# Altium PCB CHESSOBC_rev1.PcbDoc (part 3 of 4)
Units mm, origin at the board's own origin, x right, y up, seen from the top; angles counter-clockwise.
Board outline 96.01 x 90.17 mm, 6 copper layers (Top Layer, +3.3V, Layer 2, Layer 3, GND, Bottom Layer), stack 0.816 mm thick; 143 components, 230 nets, 1063 pads, 572 vias.
Unrouted connection lines stored in the file: 5.
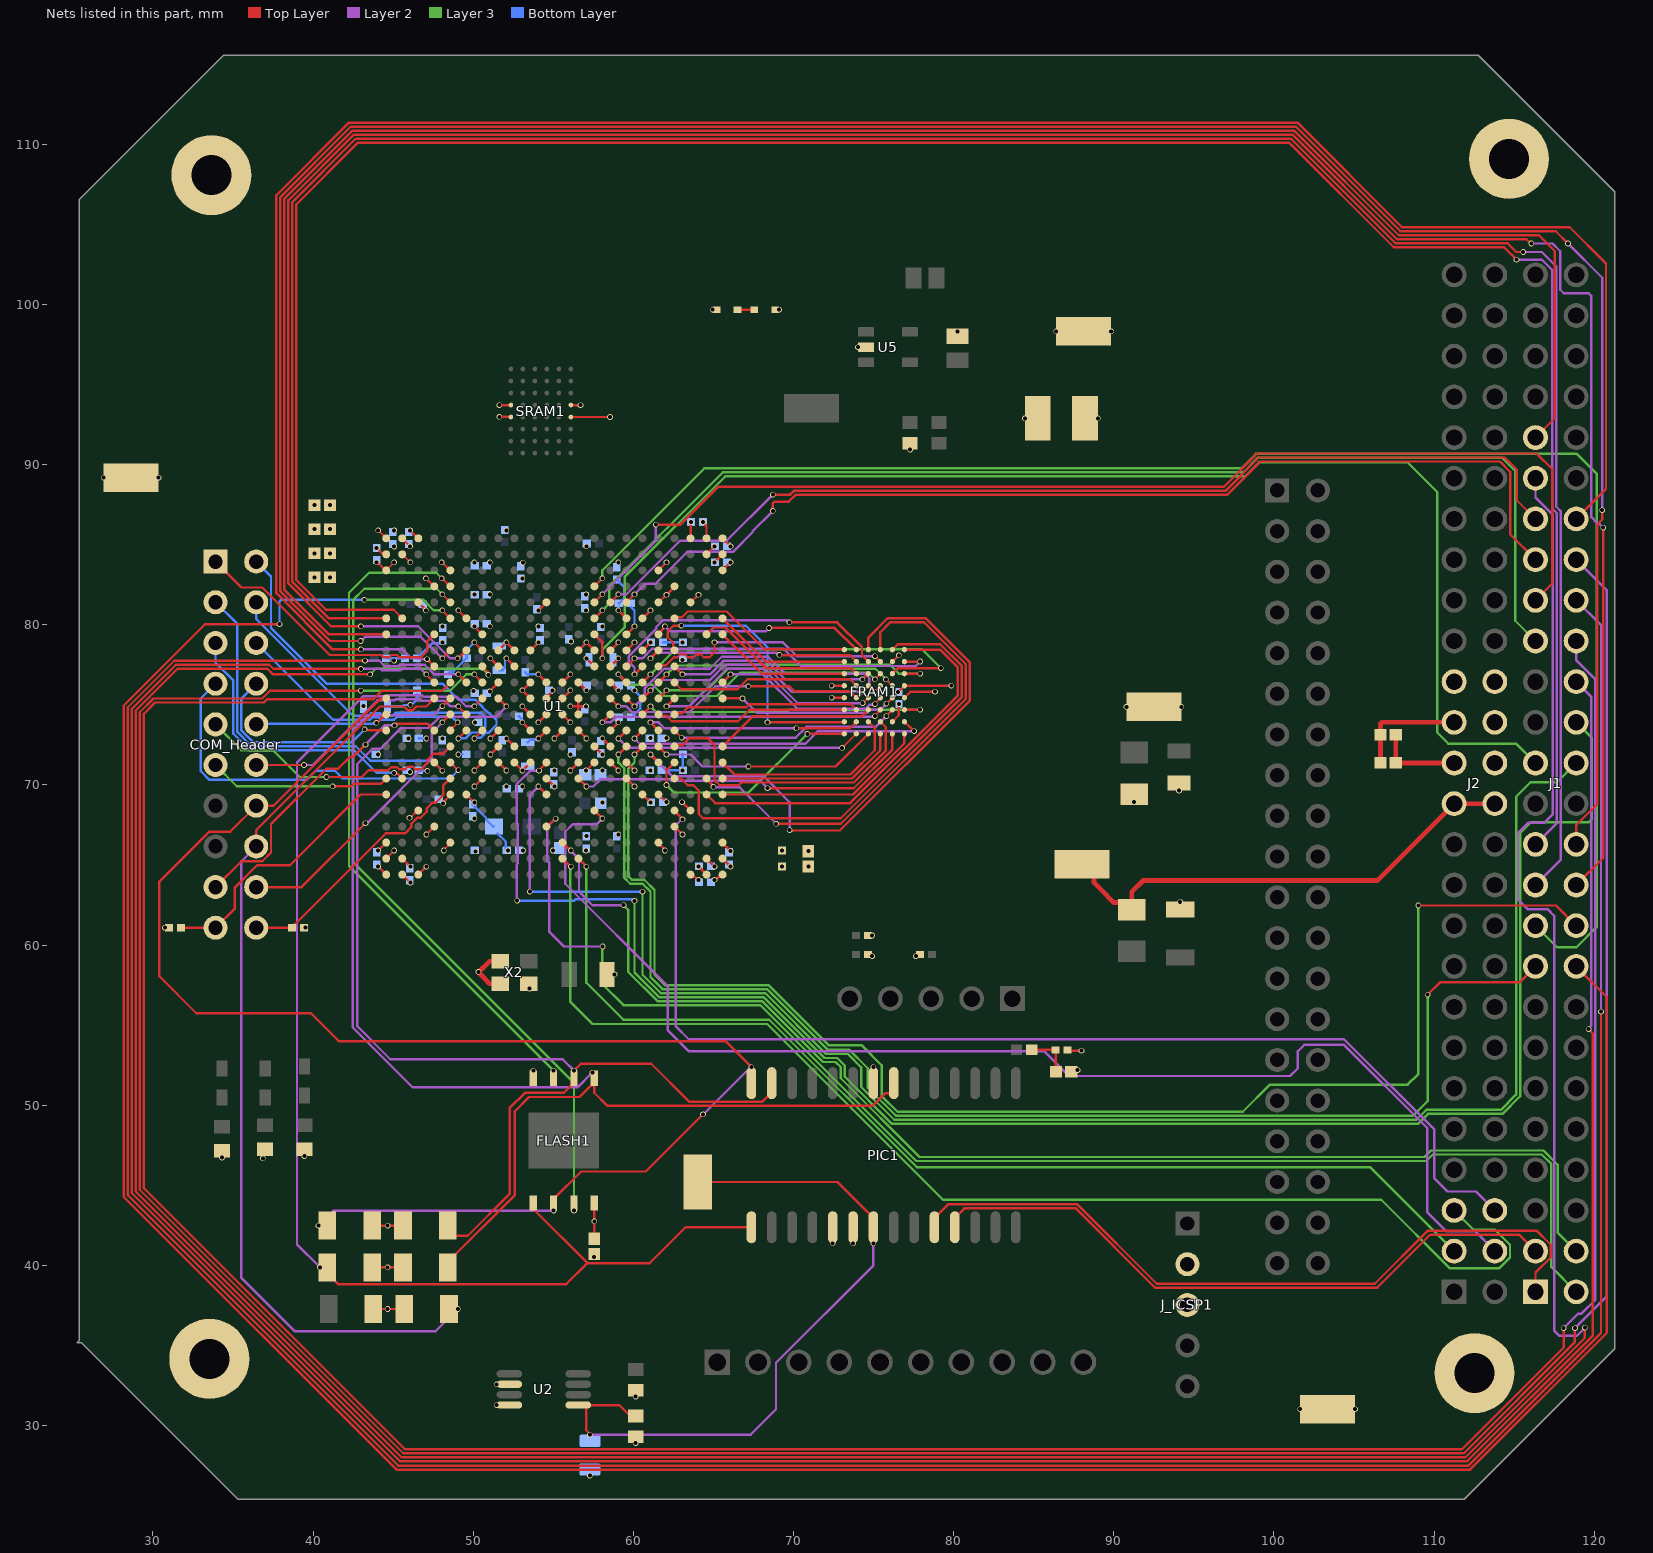
[diagram p6: the nets of this part, all layers, seen from the top]

## Via types
v1: diameter 0.35, hole 0.25, Top Layer to Bottom Layer, tented bottom, 572 vias

## Nets (pads, with @x,y where several pads share a name; then routed paths per layer and width w, separated by ;. In a path a pad name is that pad's centre, name@x,y a point inside that pad or via, vN(x,y) a via of type N, cw(c..) or ccw(c..) an arc to the next point about the centre after c; other vN are vias at no path point) (continued)
+3.3V: C2.2 C3.1 C4.2 C5.2 C9.2 C10.2 C12.2 C13.2 C14.2 C15.2 C44.1 C45.1 C46.1 C47.1 C48.2 C49.1 C50.1 C51.1 C52.1 C53.2 C54.1 C55.1 C56.1 C57.1 C59.1 C62.1 C63.1 C64.1 C65.1 C66.1 C67.2 C68.1 C69.1 C70.1 C71.1 C73.1 C74.1 C75.1 C76.1 C77.2 C78.1 C79.1 C80.1 C81.1 C82.1 C83.1 C86.1 C87.1 C88.1 C89.1 C100.2 D1.1 FLASH1.8 FRAM1.D6 FRAM1.E1 J2.27 J2.28 J_ICSP1.2 L2.2 LED2.2 PIC1.20 R1.2 R6.2 R9.2 R10.2 R11.2 R14.1 R15.1 R18.2 R19.2 R20.2 R21.2 R22.2 R23.2 SRAM1.D6 SRAM1.E1 T1.1 U1.A3 U1.A20 U1.AA2 U1.AA21 U1.AB3 U1.AB20 U1.B2 U1.B21 U1.C1 U1.C22 U1.F6 U1.F17 U1.H8 U1.H9 U1.H10 U1.H13 U1.H14 U1.H15 U1.J8 U1.J15 U1.K8 U1.K15 U1.N8 U1.N15 U1.P8 U1.P15 U1.R8 U1.R9 U1.R10 U1.R13 U1.R14 U1.R15 U1.T17 U1.U6 U1.U15 U1.U17 U1.Y1 U1.Y22 U2.2 X2.1 X2.4 | length 55.6
  Top Layer w0.15: R21.2@43.691,42.487 v1(44.663,42.487) 45.064,42.487 ; v1(43.974,83.906) 44.022,83.906 44.522,83.406 U1.A20@44.57,83.406 v1(45.07,83.906) ; v1(44.07,65.906) U1.A3@44.57,66.406 ; 44.241,39.883 v1(44.663,39.883) 45.064,39.883 ; 44.319,37.279 v1(44.663,37.279) R20.2@45.691,37.279 ; U1.B2@45.57,65.406 v1(46.07,64.906) ; U1.B21@45.57,84.406 v1(46.07,83.906) ; v1(46.056,85.906) 46.063,85.906 46.563,85.406 U1.C22@46.57,85.406 ; U1.C1@46.57,64.406 v1(47.07,64.906) ; v1(49.07,80.906) U1.F17@49.57,80.406 ; U1.F6@49.57,69.406 v1(50.07,68.906) ; v1(51.038,75.852) 51.038,75.863 51.57,76.395 U1.H13@51.57,76.406 ; v1(51.07,71.906) U1.H9@51.57,72.406 ; v1(51.07,72.906) U1.H10@51.57,73.406 ; v1(51.07,77.906) U1.H14@51.57,77.406 ; U1.H8@51.57,71.406 v1(52.07,70.906) ; U1.H15@51.57,78.406 v1(52.07,78.906) U1.J15@52.57,78.406 ; v1(51.639,92.988) 51.645,92.982 52.342,92.982 SRAM1.E1@52.348,92.976 ; U1.J8@52.57,71.406 v1(53.07,70.906) ; v1(53.07,70.906) U1.K8@53.57,71.406 ; U1.K15@53.57,78.406 v1(54.07,78.906) ; v1(56.07,70.906) U1.N8@56.57,71.406 ; SRAM1.D6@56.098,93.726 56.105,93.719 56.693,93.719 v1(56.7,93.713) ; U1.N15@56.57,78.406 v1(57.07,78.906) U1.P15@57.57,78.406 ; v1(57.045,70.906) 57.057,70.906 57.557,71.406 U1.P8@57.57,71.406 ; 57.562,42.043 v1(57.562,42.755) FLASH1.8@57.562,43.891 ; v1(58.07,72.906) U1.R9@58.57,72.406 ; U1.R8@58.57,71.406 v1(59.07,70.906) ; U1.R10@58.57,73.406 v1(59.07,73.906) ; U1.R13@58.57,76.406 v1(59.07,75.906) ; U1.R14@58.57,77.406 v1(59.07,77.906) ; U1.R15@58.57,78.406 v1(59.07,78.906) ; v1(59.07,80.906) U1.T17@59.57,80.406 ; U1.U6@60.57,69.406 v1(61.07,68.906) ; U1.U15@60.57,78.406 v1(61.07,78.906) ; U1.U17@60.57,80.406 v1(61.07,80.906) ; U1.Y1@63.57,64.406 v1(64.081,64.081) ; U1.Y22@63.57,85.406 63.582,85.419 63.582,86.407 v1(63.595,86.42) ; U1.AA2@64.57,65.406 v1(65.07,64.906) ; U1.AA21@64.57,84.406 v1(65.07,84.906) ; U1.AB3@65.57,66.406 65.57,66.387 66.07,65.887 v1(66.07,65.868) ; U1.AB20@65.57,83.406 v1(66.07,83.906) ; v1(72.386,75.45) FRAM1.E1@73.176,75.45 ; v1(76.526,75.8) FRAM1.D6@76.926,76.2 v1(79.861,76.2) ; R1.2@87.113,53.459 87.165,53.406 v1(87.984,53.406)
  Top Layer w0.3: v1@50.319,58.292 v1@50.332,58.306 ; v1(50.319,58.332) 50.319,58.319 v1@50.332,58.306 ; 51.128,57.593 51.019,57.593 50.753,57.859 50.753,57.885 v1@50.332,58.306 ; 51.128,58.993 51.02,58.993 v1@50.332,58.306 ; C9.2@107.612,71.374 J2.27@111.252,71.374 ; 107.612,71.734 C4.2@107.612,73.139
  Bottom Layer w0.15: C49.1@46.498,77.92 46.52,77.92 47.459,78.859 48.023,78.859 v1(48.07,78.906) ; C44.1@46.593,70.92 46.636,70.878 v1(47.138,70.878) ; C47.1@46.593,72.92 46.607,72.906 v1(47.07,72.906) ; C89.1@49.965,68.79 50.799,67.956 50.799,67.845 51.224,67.42 L2.2@51.299,67.42 ; L2.2@51.525,66.97 52.031,66.464 52.031,65.967 52.076,65.922 52.154,65.922 v1(52.17,65.906) ; C62.1@58.973,82.834 58.973,82.813 59.42,82.366 59.42,81.651 59.117,81.347 C68.1@59.095,81.347 ; v1(59.07,80.906) 59.095,80.932 59.095,81.111
  other v1: 60.149,31.81 51.461,32.58 73.721,41.383 74.909,60.599 30.752,61.087 39.519,61.087 70.934,65.868 57.045,65.906 69.276,65.906 91.275,68.931 52.07,69.906 55.07,70.906 61.07,70.906 61.07,72.923 90.785,74.875 94.215,74.875 43.154,74.922 51.038,79.906 57.049,80.906 51.038,81.906 53.07,82.906 40.089,82.961 50.07,83.906 40.089,84.466 45.067,85.906 40.089,85.97 40.089,87.474 77.281,90.934 89.003,92.899 64.947,99.681
+5Vin: J2.25 J2.26 LED1.2 T2.1 | length 30.3
  Top Layer w0.3: T2.1@88.131,64.534 88.555,64.534 88.774,64.315 88.774,63.891 89.184,63.48 90.009,62.656 90.68,62.656 LED1.2@91.125,62.211 91.125,63.331 91.825,64.031 106.449,64.031 J2.25@111.252,68.834 J2.26@113.792,68.834
CASE: ST1.1 ST2.1 ST3.1 ST4.1
GND: C1.1 C2.1 C3.2 C4.1 C5.1 C6.1 C7.1 C8.1 C9.1 C10.1 C12.1 C13.1 C14.1 C15.1 C16.2 C17.2 C18.2 C19.2 C20.2 C21.2 C22.2 C23.2 C24.2 C25.2 C26.2 C27.2 C28.2 C29.2 C30.2 C31.2 C32.2 C33.2 C34.2 C35.2 C36.2 C37.2 C38.2 C39.2 C40.2 C41.2 C42.2 C43.2 C44.2 C45.2 C46.2 C47.2 C48.1 C49.2 C50.2 C51.2 C52.2 C53.1 C54.2 C55.2 C56.2 C57.2 C58.1 C59.2 C62.2 C63.2 C64.2 C65.2 C66.2 C67.1 C68.2 C69.2 C70.2 C71.2 C73.2 C74.2 C75.2 C76.2 C77.1 C78.2 C79.2 C80.2 C81.2 C82.2 C83.2 C86.2 C87.2 C88.2 C89.2 C100.1 C101.2 D2.2 FLASH1.4 FRAM1.B5 FRAM1.D1 FRAM1.E6 J2.29 J2.30 J2.31 J2.32 J_ICSP1.3 PIC1.8 PIC1.19 R7.1 R8.1 R17.1 R100.2 R101.2 R_LED3_80Ohm.2 R_LED4_80Ohm.2 R_LED5_80Ohm.2 SRAM1.D1 SRAM1.E6 T4.1 T5.1 T6.1 U1.A1 U1.A2 U1.A21 U1.A22 U1.AA1 U1.AA22 U1.AB1 U1.AB2 U1.AB21 U1.AB22 U1.B1 U1.B22 U1.C5 U1.C18 U1.D4 U1.D19 U1.E3 U1.E6 U1.E20 U1.G7 U1.G8 U1.G15 U1.G16 U1.J9 U1.J14 U1.K10 U1.K11 U1.K12 U1.K13 U1.L7 U1.L10 U1.L11 U1.L12 U1.L13 U1.L18 U1.M10 U1.M11 U1.M12 U1.M13 U1.N10 U1.N11 U1.N12 U1.N13 U1.P9 U1.P14 U1.T7 U1.T8 U1.T15 U1.T16 U1.V3 U1.V6 U1.V18 U1.V20 U1.W4 U1.W19 U1.Y5 U1.Y18 U2.4 U5.2 X2.2 | length 70.9
  Top Layer w0.15: v1(43.974,84.799) 44.3,84.473 44.503,84.473 U1.A21@44.57,84.406 ; v1(44.07,64.906) U1.A1@44.57,64.406 ; v1(44.07,85.906) U1.A22@44.57,85.406 ; U1.A2@44.57,65.406 v1(45.07,65.906) ; U1.B1@45.57,64.406 v1(46.07,63.906) ; U1.B22@45.57,85.406 45.57,85.396 46.056,84.91 v1(46.056,84.899) ; v1(46.022,67.954) 46.07,67.954 46.522,68.406 U1.C5@46.57,68.406 ; U1.C18@46.57,81.406 46.57,81.393 47.043,80.919 v1(47.043,80.906) ; v1(47.043,82.901) 47.059,82.901 47.554,82.406 U1.D19@47.57,82.406 ; v1(47.07,66.906) U1.D4@47.57,67.406 ; v1(48.035,83.906) 48.052,83.906 48.552,83.406 U1.E20@48.57,83.406 ; v1(48.118,68.858) 48.118,68.906 48.57,69.358 U1.E6@48.57,69.406 ; v1(48.166,65.906) 48.166,65.954 48.57,66.358 U1.E3@48.57,66.406 ; v1(50.07,69.906) U1.G7@50.57,70.406 ; v1(50.07,70.906) U1.G8@50.57,71.406 ; v1(50.07,78.906) U1.G15@50.57,78.406 ; v1(50.07,79.906) U1.G16@50.57,79.406 ; v1(51.639,93.713) 51.646,93.719 52.341,93.719 SRAM1.D1@52.348,93.726 ; v1(52.07,72.906) U1.J9@52.57,72.406 ; v1(52.07,77.906) U1.J14@52.57,77.406 ; v1(53.07,73.906) U1.K10@53.57,73.406 ; v1(53.07,74.906) U1.K11@53.57,74.406 ; U1.K12@53.57,75.406 v1(53.07,75.906) U1.K13@53.57,76.406 ; v1(54.07,72.906) U1.L10@54.57,73.406 ; v1(54.07,73.906) U1.L11@54.57,74.406 ; v1(54.07,76.906) U1.L13@54.57,76.406 ; v1(54.07,80.906) U1.L18@54.57,81.406 ; U1.L7@54.57,70.406 v1(55.07,69.906) ; U1.L12@54.57,75.406 54.57,75.467 54.954,75.852 v1(54.954,75.906) ; v1(55.07,72.906) U1.M10@55.57,73.406 ; U1.M11@55.57,74.406 v1(56.07,73.906) ; U1.M12@55.57,75.406 v1(56.07,75.906) ; U1.M13@55.57,76.406 v1(56.07,76.906) ; v1(56.07,74.906) 56.57,74.906 ; SRAM1.E6@56.098,92.976 v1(58.542,92.976) ; U1.N10@56.57,73.406 v1(57.07,72.906) ; U1.N11@56.57,74.406 56.57,74.906 ; U1.N12@56.57,75.406 56.57,74.906 ; U1.N13@56.57,76.406 v1(57.07,75.906) ; v1(57.045,74.906) 56.57,74.906 ; v1(57.07,77.906) U1.P14@57.57,77.406 ; U1.P9@57.57,72.406 v1(58.07,71.906) ; U1.T7@59.57,70.406 v1(60.07,69.906) ; U1.T8@59.57,71.406 v1(60.07,70.906) ; U1.T15@59.57,78.406 v1(60.07,78.906) ; U1.T16@59.57,79.406 v1(60.07,79.906) ; U1.V3@61.57,66.406 61.57,66.356 61.97,65.956 v1(61.97,65.906) ; U1.V6@61.57,69.406 61.582,69.406 62.057,68.931 v1(62.07,68.931) ; U1.V18@61.57,81.406 61.588,81.406 62.052,81.87 v1(62.07,81.87) 62.57,82.37 U1.W19@62.57,82.406 ; U1.V20@61.57,83.406 v1(62.07,83.906) ; U1.W4@62.57,67.406 v1(63.07,66.906) ; v1(63.036,68.931) 63.04,68.931 63.565,68.406 U1.Y5@63.57,68.406 ; U1.Y18@63.57,81.406 63.588,81.406 64.052,81.87 v1(64.07,81.87) ; v1(64.07,64.908) U1.AA1@64.57,64.406 ; v1(64.352,86.42) 64.352,86.366 64.57,86.148 U1.AA22@64.57,85.406 ; v1(65.07,64.081) U1.AB1@65.57,64.406 ; v1(65.07,83.906) U1.AB21@65.57,84.406 ; U1.AB22@65.57,85.406 v1(66.07,84.906) ; U1.AB2@65.57,65.406 v1@66.069,64.908 ; v1(72.386,76.2) FRAM1.D1@73.176,76.2 ; FRAM1.B5@76.176,77.7 v1(76.576,78.1) ; FRAM1.E6@76.926,75.45 77.301,75.825 v1(78.838,75.825) ; C4.1@106.652,73.139 C4.1@106.672,73.139
  Top Layer w0.3: C9.1@106.652,71.374 106.652,72.779 ; 106.652,73.499 106.652,73.826 106.74,73.914 J2.29@111.252,73.914
  Bottom Layer w0.15: C19.2@44.572,77.92 44.586,77.906 v1@45.07,77.906 ; 44.879,74.92 45.595,74.92 45.67,74.995 46.059,74.995 v1(46.07,75.006) ; v1(45.07,77.767) v1@45.07,77.906 ; C49.2@45.741,77.92 45.727,77.906 v1@45.07,77.906 ; v1@46.113,74.963 46.498,75.348 46.498,75.684 ; 46.853,81.049 46.873,81.049 47.016,80.906 v1(47.043,80.906) ; C25.2@48.425,76.92 48.586,77.081 48.756,77.081 49.412,77.737 49.412,77.759 49.573,77.92 C27.2@49.595,77.92 49.595,78.431 v1(50.07,78.906) ; v1(49.073,71.906) 49.087,71.92 49.31,71.92 ; C67.1@51.639,77.17 51.839,77.17 51.989,77.32 51.989,77.771 52.07,77.852 v1(52.07,77.906) ; C23.2@52.853,74.285 52.874,74.285 53.035,74.124 53.035,73.941 v1(53.07,73.906) ; C31.2@53.243,77.041 53.378,76.906 v1(54.07,76.906) ; C48.1@53.415,72.67 53.565,72.82 53.93,72.82 54.016,72.906 v1(54.07,72.906) ; C41.2@58.974,66.799 59.07,66.894 v1(59.07,66.906) ; C75.2@59.853,74.23 59.874,74.23 60.2,74.556 60.215,74.556 60.42,74.761 60.42,75.556 v1(60.07,75.906) 60.032,75.944 59.884,75.944 59.853,75.976 ; 59.853,81.111 60.07,80.894 v1(60.07,79.906) ; C69.2@61.853,78.919 63.057,78.919 v1(63.07,78.906) ; 62.037,70.92 C43.2@63.095,70.92 ; 63.095,71.156 C37.2@63.095,71.921
  other v1: 57.287,26.879 60.149,28.906 101.632,31.02 105.062,31.02 51.461,31.28 57.547,40.514 72.451,41.383 36.868,46.688 34.313,46.742 39.46,46.823 53.752,52.166 87.74,52.193 74.991,52.383 53.531,57.287 58.825,58.175 74.909,59.318 77.637,59.318 94.15,62.709 66.07,64.908 69.276,64.906 70.934,64.908 50.153,65.858 53.12,65.906 54.974,65.906 57.07,66.801 50.07,67.906 58.07,68.906 94.075,69.65 53.07,69.906 46.061,70.801 58.07,70.906 63.07,70.906 44.07,71.906 56.07,71.906 45.96,72.906 48.07,72.906 62.07,72.923 50.1,73.906 50.032,75.868 63.07,77.81 56.107,78.962 48.07,79.906 54.07,79.906 58.07,79.906 50.07,81.906 57.049,81.906 41.049,82.961 53.095,83.881 51.038,83.906 59.07,83.906 41.049,84.466 45.067,84.894 57.07,84.906 52.07,85.906 41.049,85.97 41.049,87.474 26.929,89.189 30.359,89.189 84.453,92.899 74.031,97.341 80.24,98.323 86.401,98.33 89.842,98.33 69.107,99.681
NetC1_2: C1.2 R1.1 R2.1 | length 2.6
  Top Layer w0.15: R2.1@84.884,53.459 R1.1@86.363,53.459 ; 86.363,53.234 86.383,53.214 C1.2@86.383,52.084
NetC58_2: C58.2 PIC1.21 R17.2 T7.1 U2.5 | length 43.6
  Top Layer w0.15: U2.5@56.561,31.28 U2.5@56.922,31.28 ; v1(57.287,29.429) 57.287,29.483 57.061,29.71 57.061,31.141 U2.5@56.922,31.28 ; R17.2@60.149,30.33 60.074,30.33 59.124,31.28 U2.5@56.922,31.28 ; T7.1@64.008,45.207 72.746,45.207 74.991,42.962 PIC1.21@74.991,42.383
  Layer 2 w0.15: v1(57.287,29.429) 67.32,29.429 68.908,31.018 68.908,33.922 74.991,40.005 v1(74.991,41.383)
NetCOM_Header_1: COM_Header.1 U1.D16 | length 17.2
  Top Layer w0.15: COM_Header.1@33.909,83.947 35.524,82.332 36.832,82.332 41.047,78.117 44.258,78.117 44.394,77.981 44.746,77.981 44.882,78.117 45.258,78.117 45.394,77.981 46.746,77.981 47.125,78.359 47.125,78.961 U1.D16@47.57,79.406
NetCOM_Header_2: COM_Header.2 U1.G10 | length 23.7
  Top Layer w0.15: v1(50.07,72.906) U1.G10@50.57,73.406
  Bottom Layer w0.15: COM_Header.2@36.449,83.947 37.374,83.022 37.374,79.797 40.84,76.331 48.084,76.331 49.102,75.313 50.158,75.313 50.56,74.911 50.56,74.889 50.979,74.47 51.038,74.47 51.457,74.051 51.457,73.761 50.952,73.256 50.774,73.256 50.462,72.944 50.108,72.944 v1(50.07,72.906)
NetCOM_Header_3: COM_Header.3 U1.D8 | length 23.2
  Top Layer w0.15: U1.D8@47.57,71.406 47.57,71.402 48.07,70.902 v1(48.07,70.899)
  Bottom Layer w0.15: COM_Header.3@33.909,81.407 35.274,80.042 35.274,73.3 36.152,72.422 42.666,72.422 43.579,71.509 47.46,71.509 v1(48.07,70.899)
NetCOM_Header_4: COM_Header.4 U1.F10 | length 21.5
  Top Layer w0.15: v1(49.07,72.906) U1.F10@49.57,73.406
  Bottom Layer w0.15: COM_Header.4@36.449,81.407 36.449,80.368 42.497,74.32 43.452,74.32 43.613,74.481 44.196,74.481 44.357,74.32 44.952,74.32 45.138,74.506 50.48,74.506 50.757,74.229 50.757,73.611 50.423,73.278 49.893,73.278 49.522,72.906 v1(49.07,72.906)
NetCOM_Header_5: COM_Header.5 U1.B7 | length 17.8
  Top Layer w0.15: v1(45.07,70.755) 45.108,70.717 45.266,70.717 45.57,70.413 U1.B7@45.57,70.406
  Bottom Layer w0.15: COM_Header.5@33.909,78.867 33.909,77.635 35.024,76.52 35.024,73.197 36.049,72.172 42.562,72.172 43.979,70.755 v1(45.07,70.755)
NetCOM_Header_6: COM_Header.6 U1.E10 | length 15.6
  Top Layer w0.15: U1.E10@48.57,73.406 48.57,73.424 49.035,73.888 v1(49.035,73.906)
  Bottom Layer w0.15: COM_Header.6@36.449,78.867 41.246,74.07 43.555,74.07 43.716,74.231 44.092,74.231 44.253,74.07 45.055,74.07 45.241,74.256 48.685,74.256 v1(49.035,73.906)
NetCOM_Header_7: COM_Header.7 U1.E8 | length 23.5
  Top Layer w0.15: U1.E8@48.57,71.406 48.579,71.406 49.061,70.923 v1(49.07,70.923)
  Bottom Layer w0.15: COM_Header.7@33.909,76.327 32.984,75.402 32.984,70.864 33.526,70.322 39.595,70.322 40.159,70.886 41.364,70.886 41.845,70.405 48.552,70.405 v1(49.07,70.923)
NetCOM_Header_8: COM_Header.8 U1.A10 | length 13
  Top Layer w0.15: v1(43.228,73.47) 43.267,73.432 43.42,73.432 43.446,73.406 U1.A10@44.57,73.406
  Bottom Layer w0.15: COM_Header.8@36.449,76.327 35.524,75.402 35.524,73.404 36.248,72.68 42.439,72.68 v1(43.228,73.47)
NetCOM_Header_9: COM_Header.9 U1.E9 | length 17.2
  Top Layer w0.15: v1(40.831,70.497) 43.044,70.497 43.478,70.931 44.696,70.931 44.871,71.105 45.246,71.105 45.371,70.981 45.746,70.981 45.916,71.151 46.224,71.151 46.394,70.981 46.746,70.981 47.132,71.367 47.132,71.569 47.518,71.955 48.119,71.955 U1.E9@48.57,72.406
  Layer 3 w0.15: COM_Header.9@33.909,73.787 35.524,72.172 37.496,72.172 39.171,70.497 v1(40.831,70.497)
NetCOM_Header_10: COM_Header.10 U1.A11 | length 8.4
  Top Layer w0.15: v1(43.947,73.881) 43.996,73.881 44.521,74.406 U1.A11@44.57,74.406
  Bottom Layer w0.15: COM_Header.10@36.449,73.787 36.482,73.82 43.832,73.82 43.893,73.881 v1(43.947,73.881)
NetCOM_Header_11: COM_Header.11 U1.A7 | length 11.4
  Top Layer w0.15: v1(41.226,69.917) 42.392,69.917 42.556,70.081 44.245,70.081 U1.A7@44.57,70.406
  Layer 3 w0.15: COM_Header.11@33.909,71.247 35.239,69.917 v1(41.226,69.917)
NetCOM_Header_12: COM_Header.12 U1.F11 | length 15.2
  Top Layer w0.15: COM_Header.12@36.449,71.247 v1(39.434,71.247) ; v1(49.07,74.906) U1.F11@49.57,74.406
  Layer 2 w0.15: v1(39.434,71.247) 39.979,71.247 44.018,75.286 45.081,75.286 45.152,75.356 46.641,75.356 46.725,75.272 48.215,75.272 48.581,74.906 v1(49.07,74.906)
NetCOM_Header_14: COM_Header.14 FLASH1.6 PIC1.14 R21.1 U1.A12 | length 95.2
  Top Layer w0.15: U1.A12@44.57,75.406 44.555,75.391 44.213,75.391 37.529,68.707 COM_Header.14@36.449,68.707 34.834,67.092 33.526,67.092 30.402,63.968 30.402,58.054 32.711,55.745 39.869,55.745 41.603,54.011 65.744,54.011 v1(67.371,52.383) ; FLASH1.6@55.022,43.891 55.022,44.141 56.747,45.866 60.778,45.866 v1(64.35,49.438)
  Layer 2 w0.15: v1(40.341,42.487) 41.269,43.416 v1(55.022,43.416) ; v1(64.35,49.438) 64.388,49.438 67.333,52.383 v1(67.371,52.383)
NetCOM_Header_16: COM_Header.16 R20.1 U1.D12 | length 58.5
  Top Layer w0.15: COM_Header.16@36.449,66.167 36.449,67.186 44.161,74.898 45.679,74.898 45.921,74.656 46.219,74.656 46.461,74.898 47.07,74.898 47.57,75.398 U1.D12@47.57,75.406
  Layer 2 w0.15: COM_Header.16@36.449,66.167 35.524,65.242 35.524,39.219 38.846,35.897 47.659,35.897 v1(49.041,37.279)
NetCOM_Header_17: COM_Header.17 U1.D10 | length 19.1
  Top Layer w0.15: COM_Header.17@33.909,63.627 35.524,65.242 36.832,65.242 37.374,65.784 37.374,67.555 40.831,71.012 41.568,71.012 42.305,71.749 42.498,71.749 v1(43.273,72.524) ; v1(45.086,73.721) 45.141,73.721 45.25,73.831 47.145,73.831 U1.D10@47.57,73.406
  Layer 2 w0.15: v1(43.273,72.524) 44.47,73.721 v1(45.086,73.721)
NetCOM_Header_18: COM_Header.18 U1.E11 | length 17.5
  Top Layer w0.15: COM_Header.18@36.449,63.627 39.286,63.627 v1(43.273,67.614) ; v1(48.07,73.906) U1.E11@48.57,74.406
  Layer 2 w0.15: v1(43.273,67.614) 43.328,67.614 43.412,67.699 43.454,67.699 47.42,71.665 47.42,73.256 v1(48.07,73.906)
NetCOM_Header_19: COM_Header.19 R10.1 U1.A6 | length 17
  Top Layer w0.15: R10.1@31.752,61.087 COM_Header.19@33.909,61.087 35.117,62.295 35.117,63.603 36.506,64.992 38.551,64.992 42.965,69.406 U1.A6@44.57,69.406
NetCOM_Header_20: COM_Header.20 R11.1 U1.E7 | length 16.6
  Top Layer w0.15: COM_Header.20@36.449,61.087 R11.1@38.694,61.087 38.719,61.087 38.869,61.237 38.869,61.306 44.539,66.976 45.741,66.976 46.134,67.369 46.134,67.571 46.523,67.96 46.725,67.96 47.102,68.337 47.102,68.539 47.459,68.896 47.661,68.896 48.125,69.36 48.125,69.961 U1.E7@48.57,70.406
NetD1_2: D1.2 D2.1 | length 1
  Top Layer w0.15: D1.2@66.507,99.681 D2.1@67.547,99.681
NetFLASH1_1: FLASH1.1 PIC1.7 R18.1 U1.E12 | length 80.2
  Top Layer w0.15: v1(48.07,74.922) 48.078,74.922 48.562,75.406 U1.E12@48.57,75.406 ; R18.1@48.414,39.883 48.414,40.208 52.6,44.395 52.6,49.629 53.487,50.515 56.637,50.515 57.358,51.236 FLASH1.1@57.562,51.236 ; FLASH1.1@57.562,51.691 FLASH1.1@57.562,51.236 ; PIC1.7@76.261,51.383 76.261,50.965 76.053,50.757 75.736,50.757 74.938,49.958 58.386,49.958 57.562,50.782 FLASH1.1@57.562,51.236
  Layer 2 w0.15: v1(48.07,74.922) 47.504,74.356 43.442,74.356 42.48,73.394 42.48,54.865 46.227,51.118 56.515,51.118 v1(57.435,52.039)
NetFLASH1_2: FLASH1.2 PIC1.13 R22.1 U1.H12 | length 72.6
  Top Layer w0.15: R22.1@48.414,42.487 48.414,42.329 48.889,41.854 49.657,41.854 52.272,44.468 52.272,49.821 53.224,50.774 55.657,50.774 56.142,51.259 56.142,51.541 FLASH1.2@56.292,51.691 ; U1.H12@51.57,75.406 v1(52.07,74.906) ; FLASH1.2@56.227,52.1 v1(56.292,52.166) 56.721,52.594 61.117,52.594 63.503,50.208 68.044,50.208 68.641,50.805 PIC1.13@68.641,51.383
  Layer 2 w0.15: v1(52.07,74.906) 51.42,74.256 47.915,74.256 47.215,73.556 45.502,73.556 44.205,72.259 43.705,72.259 42.757,71.31 42.757,54.942 44.821,52.878 55.58,52.878 v1(56.292,52.166)
NetFLASH1_3: FLASH1.3 U1.E19 | length 42.3
  Top Layer w0.15: v1(48.035,82.906) 48.052,82.906 48.552,82.406 U1.E19@48.57,82.406
  Layer 3 w0.15: v1(48.035,82.906) 47.69,83.251 43.491,83.251 42.248,82.008 42.248,64.94 v1(55.022,52.166)
NetFLASH1_5: FLASH1.5 PIC1.15 R23.1 U1.G12 | length 79.7
  Top Layer w0.15: R23.1@40.891,39.883 41.366,39.408 41.366,39.026 41.558,38.833 55.815,38.833 57.13,40.148 ; v1(50.07,74.906) U1.G12@50.57,75.406 ; FLASH1.5@53.752,43.891 53.902,43.741 53.902,43.376 57.13,40.148 ; PIC1.15@67.371,42.383 63.264,42.383 61.029,40.148 57.13,40.148
  Layer 2 w0.15: v1(40.426,39.883) 39,41.309 39,41.346 39,71.409 43.126,75.536 44.687,75.536 44.758,75.606 46.811,75.606 46.895,75.522 48.949,75.522 49.565,74.906 v1(50.07,74.906)
NetFLASH1_7: FLASH1.7 U1.E18 | length 50.6
  Top Layer w0.15: v1(48.07,81.906) U1.E18@48.57,81.406
  Layer 3 w0.15: v1(48.07,81.906) 47.72,82.256 43.2,82.256 42.5,81.556 42.5,65.189 56.292,51.396 v1(56.292,43.416)
NetFRAM1_A1: FRAM1.A1 U1.W17 | length 11.8
  Top Layer w0.15: U1.W17@62.57,80.406 62.637,80.473 63.036,80.473 63.394,80.831 65.836,80.831 68.194,78.473 73.153,78.473 FRAM1.A1@73.176,78.45
NetFRAM1_A2: FRAM1.A2 U1.V16 | length 13.4
  Top Layer w0.15: U1.V16@61.57,79.406 61.57,79.454 61.972,79.856 v1(61.972,79.904) ; v1(68.477,79.806) 72.57,79.806 FRAM1.A2@73.926,78.45
  Layer 2 w0.15: v1(61.972,79.904) 62.282,79.594 68.265,79.594 v1(68.477,79.806)
NetFRAM1_A3: FRAM1.A3 U1.V8 | length 38.1
  Top Layer w0.15: v1(61.07,71.906) U1.V8@61.57,71.406 ; v1(69.765,67.181) 69.79,67.156 72.887,67.156 81.012,75.281 81.012,77.639 78.234,80.417 75.891,80.417 74.676,79.202 FRAM1.A3@74.676,78.45
  Layer 2 w0.15: v1(61.07,71.906) 62.42,70.556 68.121,70.556 69.765,68.911 v1(69.765,67.181)
NetFRAM1_A4: FRAM1.A4 U1.AA7 | length 30.6
  Top Layer w0.15: U1.AA7@64.57,70.406 64.57,70.358 64.999,69.929 v1(64.999,69.881) ; v1(68.921,67.576) 72.954,67.576 80.762,75.385 80.762,77.535 78.13,80.167 76.052,80.167 75.426,79.541 FRAM1.A4@75.426,78.45
  Layer 2 w0.15: v1(64.999,69.881) 65.022,69.858 66.639,69.858 v1(68.921,67.576)
NetFRAM1_A5: FRAM1.A5 U1.W7 | length 29.9
  Top Layer w0.15: U1.W7@62.57,70.406 62.969,70.406 63.394,69.981 63.746,69.981 64.081,69.646 64.081,68.198 64.351,67.927 72.951,67.927 80.512,75.488 80.512,77.432 79.154,78.79 76.516,78.79 FRAM1.A5@76.176,78.45
NetFRAM1_A6: FRAM1.A6 U1.AA6 | length 24.2
  Top Layer w0.15: U1.AA6@64.57,69.406 65.11,68.866 73.536,68.866 80.262,75.592 80.262,77.328 79.14,78.45 FRAM1.A6@76.926,78.45
NetFRAM1_B1: FRAM1.B1 U1.AB17 | length 8.7
  Top Layer w0.15: U1.AB17@65.57,80.406 68.276,77.7 FRAM1.B1@73.176,77.7
NetFRAM1_B2: FRAM1.B2 U1.V15 | length 13.9
  Top Layer w0.15: v1(61.07,77.906) U1.V15@61.57,78.406 ; v1(69.115,78.123) 69.129,78.11 73.516,78.11 FRAM1.B2@73.926,77.7
  Layer 2 w0.15: v1(61.07,77.906) 61.42,78.256 68.929,78.256 69.061,78.123 v1(69.115,78.123)
NetFRAM1_B3: FRAM1.B3 U1.U14 | length 19.3
  Top Layer w0.15: v1(60.07,76.906) U1.U14@60.57,77.406 ; v1(69.745,80.156) 72.726,80.156 74.276,78.606 74.276,78.1 FRAM1.B3@74.676,77.7
  Layer 2 w0.15: v1(60.07,76.906) 60.07,77.331 59.72,77.681 59.72,78.051 61.42,79.751 61.42,79.847 61.867,80.294 69.557,80.294 69.696,80.156 v1(69.745,80.156)
NetFRAM1_B4: FRAM1.B4 U1.V14 | length 15.7
  Top Layer w0.15: U1.V14@61.57,77.406 61.637,77.473 62.036,77.473 62.544,77.981 62.746,77.981 62.925,78.16 63.215,78.16 63.394,77.981 63.746,77.981 63.925,78.16 64.215,78.16 64.394,77.981 64.746,77.981 65.07,78.305 v1(65.07,78.906) ; v1@75.076,78.1 v1(75.076,78.05) FRAM1.B4@75.426,77.7
  Layer 2 w0.15: v1(65.07,78.906) 69.345,78.906 70.201,78.05 v1(75.076,78.05)
NetFRAM1_B6: FRAM1.B6 U1.T14 | length 20.3
  Top Layer w0.15: U1.T14@59.57,77.406 v1(60.07,77.906) ; FRAM1.B6@76.926,77.7 v1@77.911,77.7
  Layer 2 w0.15: v1(60.07,77.906) 60.575,77.906 61.175,78.506 69.384,78.506 70.461,77.429 77.63,77.429 v1(77.911,77.711)
NetFRAM1_C1: FRAM1.C1 U1.AB16 | length 8.6
  Top Layer w0.15: U1.AB16@65.57,79.406 68.026,76.95 FRAM1.C1@73.176,76.95
NetFRAM1_C2: FRAM1.C2 U1.AA16 | length 10.7
  Top Layer w0.15: U1.AA16@64.57,79.406 64.995,79.831 65.746,79.831 68.275,77.302 73.574,77.302 FRAM1.C2@73.926,76.95
NetFRAM1_C3: FRAM1.C3 U1.W14 | length 13.3
  Top Layer w0.15: U1.W14@62.57,77.406 v1(63.07,76.906) ; v1(74.3,76.6) 74.65,76.95 FRAM1.C3@74.676,76.95
  Layer 2 w0.15: v1(63.07,76.906) 64.776,76.906 65.626,77.756 68.313,77.756 69.469,76.6 v1(74.3,76.6)
NetFRAM1_C4: FRAM1.C4 U1.T13 | length 18.5
  Top Layer w0.15: v1(59.07,76.906) U1.T13@59.57,76.406 ; v1(75.076,76.6) FRAM1.C4@75.426,76.95
  Layer 3 w0.15: v1(59.07,76.906) 59.72,76.256 61.215,76.256 61.915,75.556 65.215,75.556 66.665,77.006 74.67,77.006 v1(75.076,76.6)
NetFRAM1_C5: FRAM1.C5 U1.U13 | length 23.1
  Top Layer w0.15: U1.U13@60.57,76.406 v1(61.07,76.906) ; FRAM1.C5@76.176,76.95 76.526,77.3 v1(79.199,77.3)
  Layer 3 w0.15: v1(61.07,76.906) 62.637,78.473 78.025,78.473 v1(79.199,77.3)
NetFRAM1_C6: FRAM1.C6 U1.V13 | length 18
  Top Layer w0.15: U1.V13@61.57,76.406 v1(62.07,76.906) ; FRAM1.C6@76.926,76.95 v1(77.911,76.95)
  Layer 3 w0.15: v1(62.07,76.906) 62.624,77.46 65.772,77.46 65.818,77.506 76.024,77.506 76.58,76.95 v1(77.911,76.95)
NetFRAM1_D2: FRAM1.D2 U1.W13 | length 12
  Top Layer w0.15: U1.W13@62.57,76.406 62.995,75.981 66.507,75.981 67.126,76.6 73.526,76.6 FRAM1.D2@73.926,76.2
NetFRAM1_D3: FRAM1.D3 U1.U12 | length 15.8
  Top Layer w0.15: U1.U12@60.57,75.406 v1(61.07,75.906) ; v1(74.276,75.831) 74.292,75.831 74.66,76.2 FRAM1.D3@74.676,76.2
  Layer 2 w0.15: v1(61.07,75.906) 61.72,76.556 64.78,76.556 65.73,77.506 68.209,77.506 69.903,75.812 74.257,75.812 v1(74.276,75.831)
NetFRAM1_D4: FRAM1.D4 U1.T12 | length 19
  Top Layer w0.15: U1.T12@59.57,75.406 v1(60.07,74.906) ; v1(75.076,75.8) 75.076,75.825 75.426,76.175 FRAM1.D4@75.426,76.2
  Layer 2 w0.15: v1(60.07,74.906) 60.72,75.556 60.72,76.051 61.925,77.256 64.773,77.256 65.523,78.006 68.416,78.006 69.464,76.958 74.437,76.958 74.726,76.669 74.726,76.15 v1(75.076,75.8)
NetFRAM1_D5: FRAM1.D5 U1.V12 | length 15.8
  Top Layer w0.15: U1.V12@61.57,75.406 v1(62.07,75.906) ; v1(75.771,76.6) 76.171,76.2 FRAM1.D5@76.176,76.2
  Layer 3 w0.15: v1(62.07,75.906) 64.571,75.906 65.921,77.256 75.115,77.256 v1(75.771,76.6)
NetFRAM1_E2: FRAM1.E2 U1.R12 | length 16.7
  Top Layer w0.15: U1.R12@58.57,75.406 v1(59.07,74.906) ; v1(67.183,76.162) 69.745,76.162 70.057,75.85 73.526,75.85 FRAM1.E2@73.926,75.45
  Layer 2 w0.15: v1(59.07,74.906) 59.575,74.906 59.925,74.556 63.524,74.556 65.13,76.162 v1(67.183,76.162)
NetFRAM1_E3: FRAM1.E3 U1.W12 | length 15.3
  Top Layer w0.15: v1(62.07,74.906) U1.W12@62.57,75.406 ; v1(74.322,75.106) 74.327,75.106 74.671,75.45 FRAM1.E3@74.676,75.45
  Layer 2 w0.15: v1(62.07,74.906) 63.483,74.906 65.833,77.256 68.106,77.256 70.262,75.1 74.316,75.1 v1(74.322,75.106)
NetFRAM1_E4: FRAM1.E4 U1.AB13 | length 11.3
  Top Layer w0.15: U1.AB13@65.57,76.406 v1(66.07,76.906) ; v1(75.076,75.046) 75.076,75.073 75.426,75.423 FRAM1.E4@75.426,75.45
  Layer 2 w0.15: v1(66.07,76.906) 68.094,76.906 70.244,74.756 74.499,74.756 74.751,75.008 75.038,75.008 v1(75.076,75.046)
NetFRAM1_E5: FRAM1.E5 U1.AB12 | length 11.4
  Top Layer w0.15: U1.AB12@65.57,75.406 66.815,75.406 v1(66.819,75.402) ; v1(75.8,75.074) FRAM1.E5@76.176,75.45
  Layer 2 w0.15: v1(66.819,75.402) 67.715,74.506 74.603,74.506 74.783,74.686 75.412,74.686 v1(75.8,75.074)
NetFRAM1_F1: FRAM1.F1 U1.V11 | length 12.1
  Top Layer w0.15: U1.V11@61.57,74.406 61.637,74.339 62.036,74.339 62.394,73.981 66.527,73.981 67.246,74.7 FRAM1.F1@73.176,74.7
NetFRAM1_F2: FRAM1.F2 U1.W11 | length 11.8
  Top Layer w0.15: U1.W11@62.57,74.406 62.637,74.473 63.036,74.473 63.421,74.858 67.051,74.858 67.232,75.04 73.586,75.04 FRAM1.F2@73.926,74.7
NetFRAM1_F3: FRAM1.F3 U1.AB9 | length 10.1
  Top Layer w0.15: U1.AB9@65.57,72.406 67.464,74.3 74.276,74.3 FRAM1.F3@74.676,74.7
NetFRAM1_F4: FRAM1.F4 U1.R11 | length 18.4
  Top Layer w0.15: v1(58.07,73.906) U1.R11@58.57,74.406 ; v1(75.076,74.3) 75.076,74.325 75.426,74.675 FRAM1.F4@75.426,74.7
  Layer 2 w0.15: v1(58.07,73.906) 58.575,73.906 58.925,74.256 74.891,74.256 74.896,74.262 75.038,74.262 v1(75.076,74.3)
NetFRAM1_F5: FRAM1.F5 U1.W10 | length 14.5
  Top Layer w0.15: U1.W10@62.57,73.406 v1(63.022,72.954) ; v1(75.8,74.3) 75.8,74.324 FRAM1.F5@76.176,74.7
  Layer 2 w0.15: v1(63.022,72.954) 70.134,72.954 70.807,73.627 75.127,73.627 v1(75.8,74.3)
NetFRAM1_F6: FRAM1.F6 U1.U11 | length 18.7
  Top Layer w0.15: U1.U11@60.57,74.406 v1(61.07,74.906) ; FRAM1.F6@76.926,74.7 v1(77.911,74.7)
  Layer 3 w0.15: v1(61.07,74.906) 61.42,74.556 69.588,74.556 69.728,74.696 77.907,74.696 v1(77.911,74.7)
NetFRAM1_G1: FRAM1.G1 U1.W15 | length 17.8
  Top Layer w0.15: U1.W15@62.57,78.406 62.503,78.473 62.503,78.872 62.145,79.23 62.145,79.582 62.507,79.944 v1(62.995,79.944) ; v1(68.376,73.906) 68.398,73.928 73.154,73.928 FRAM1.G1@73.176,73.95
  Bottom Layer w0.15: v1(62.995,79.944) 67.03,79.944 68.376,78.599 v1(68.376,73.906)
NetFRAM1_G2: FRAM1.G2 U1.V10 | length 13.9
  Top Layer w0.15: v1(61.07,73.906) U1.V10@61.57,73.406 ; v1(70.178,73.543) 73.519,73.543 FRAM1.G2@73.926,73.95
  Layer 2 w0.15: v1(61.07,73.906) 61.575,73.906 61.938,73.543 v1(70.178,73.543)
NetFRAM1_G3: FRAM1.G3 U1.AB8 | length 12.4
  Top Layer w0.15: U1.AB8@65.57,71.406 66.32,70.656 73.558,70.656 75.076,72.174 75.076,73.55 FRAM1.G3@74.676,73.95
NetFRAM1_G4: FRAM1.G4 U1.W9 | length 18.7
  Top Layer w0.15: U1.W9@62.57,72.406 62.637,72.473 63.036,72.473 63.469,72.906 64.671,72.906 65.07,72.507 65.07,70.305 65.394,69.981 66.571,69.981 66.746,70.156 73.766,70.156 75.766,72.156 75.766,73.61 FRAM1.G4@75.426,73.95
NetFRAM1_G5: FRAM1.G5 R9.1 | length 1.3
  Top Layer w0.15: FRAM1.G5@76.176,73.95 76.576,74.35 v1(76.576,75.05)
NetFRAM1_G6: FRAM1.G6 U1.U10 | length 19.5
  Top Layer w0.15: v1(60.07,72.906) U1.U10@60.57,73.406 ; FRAM1.G6@76.926,73.95 76.936,73.95 77.521,73.365 v1(77.53,73.365)
  Layer 2 w0.15: v1(60.07,72.906) 60.403,72.573 70.743,72.573 71.535,73.365 v1(77.53,73.365)
NetFRAM1_H1: FRAM1.H1 U1.W8 | length 14.4
  Top Layer w0.15: v1(62.07,70.002) 62.07,70.906 U1.W8@62.57,71.406 ; v1(70.868,73.193) 70.872,73.196 73.172,73.196 FRAM1.H1@73.176,73.2
  Layer 3 w0.15: v1(62.07,70.002) 62.541,69.531 67.199,69.531 70.861,73.193 v1(70.868,73.193)
NetFRAM1_H2: FRAM1.H2 U1.T10 | length 16.2
  Top Layer w0.15: v1(59.07,72.906) U1.T10@59.57,73.406 ; v1(73.04,72.323) 73.044,72.323 73.922,73.2 FRAM1.H2@73.926,73.2
  Layer 2 w0.15: v1(59.07,72.906) 59.653,72.323 v1(73.04,72.323)
NetFRAM1_H3: FRAM1.H3 U1.V9 | length 14.5
  Top Layer w0.15: U1.V9@61.57,72.406 v1(62.07,71.906) ; v1(67.183,71.156) 72.632,71.156 FRAM1.H3@74.676,73.2
  Layer 2 w0.15: v1(62.07,71.906) 63.575,71.906 64.325,71.156 v1(67.183,71.156)
NetFRAM1_H4: FRAM1.H4 U1.AB7 | length 11.6
  Top Layer w0.15: U1.AB7@65.57,70.406 73.662,70.406 75.426,72.17 FRAM1.H4@75.426,73.2
NetFRAM1_H5: FRAM1.H5 U1.N7 | length 22.2
  Top Layer w0.15: U1.N7@56.57,70.406 v1(57.07,69.906) ; v1(68.376,69.806) 68.382,69.8 73.763,69.8 76.176,72.213 FRAM1.H5@76.176,73.2
  Layer 2 w0.15: v1(57.07,69.906) 57.495,69.906 57.941,70.352 62.27,70.352 62.366,70.256 67.925,70.256 v1(68.376,69.806)
NetFRAM1_H6: FRAM1.H6 U1.AB6 | length 13.3
  Top Layer w0.15: U1.AB6@65.57,69.406 73.723,69.406 76.926,72.609 FRAM1.H6@76.926,73.2
NetJ1_1: J1.1 PIC1.24 | length 46.5
  Top Layer w0.15: PIC1.24@78.801,42.383 78.801,42.962 79.083,43.244 79.648,43.808 87.735,43.808 92.686,38.857 106.298,38.857 109.613,42.172 116.398,42.172 117.282,41.288 117.282,40.5 116.332,39.55 J1.1@116.332,38.354
NetJ1_2: J1.2 U1.L4 | length 87
  Top Layer w0.15: U1.L4@54.57,67.406 54.618,67.406 55.104,67.892 v1(55.152,67.892)
  Layer 2 w0.15: v1(55.152,67.892) 54.624,67.364 54.624,65.271 54.741,65.155 54.741,60.854 55.678,59.918 v1(58.088,59.918)
  Layer 3 w0.15: v1(58.088,59.918) 58.07,59.899 58.07,57.562 59.377,56.255 67.929,56.255 77.662,46.522 109.513,46.522 109.915,46.924 116.726,46.924 117.322,46.327 117.322,39.904 J1.2@118.872,38.354
NetJ1_3: J1.3 PIC1.25 | length 40.9
  Top Layer w0.15: PIC1.25@80.071,42.383 80.071,42.962 80.668,43.558 87.631,43.558 92.583,38.607 106.446,38.607 109.761,41.922 115.304,41.922 J1.3@116.332,40.894
NetJ1_4: J1.4 U1.M3 | length 80.6
  Top Layer w0.15: U1.M3@55.57,66.406 55.586,66.406 56.086,65.906 v1(56.102,65.906)
  Layer 2 w0.15: v1(56.102,65.906) 56.102,65.874 56.606,65.37 56.606,63.345 57.459,62.492 v1(59.393,62.492)
  Layer 3 w0.15: v1(59.393,62.492) 59.672,62.213 59.672,58.339 61.506,56.505 68.032,56.505 71.833,52.704 72.625,52.704 72.948,52.382 72.948,51.69 77.866,46.772 109.41,46.772 109.812,47.174 116.829,47.174 117.717,46.286 117.717,42.049 J1.4@118.872,40.894
NetJ1_17: J1.17 U1.T9 | length 83.2
  Top Layer w0.15: v1(59.07,71.906) U1.T9@59.57,72.406 ; v1(109.602,56.909) 110.369,57.677 115.335,57.677 J1.17@116.332,58.674
  Layer 3 w0.15: v1(59.07,71.906) 59.07,71.401 59.422,71.049 59.422,64.213 59.805,63.83 60.582,63.83 61.07,63.341 61.07,58.002 61.817,57.255 68.343,57.255 72.114,53.485 73.469,53.485 74.641,52.312 74.641,51.094 76.393,49.342 108.675,49.342 109.602,50.269 v1(109.602,56.909)
NetJ1_18: J1.18 U1.E17 | length 182
  Top Layer w0.15: v1(37.906,80.042) 33.264,80.042 28.181,74.959 28.181,44.28 45.209,27.252 112.251,27.252 120.784,35.786 120.784,56.762 J1.18@118.872,58.674 ; v1(48.07,80.906) U1.E17@48.57,80.406
  Layer 3 w0.15: v1(43.2,81.556) 46.888,81.556 47.538,80.906 v1(48.07,80.906)
  Bottom Layer w0.15: v1(37.906,80.042) 37.906,81.468 37.994,81.556 v1(43.2,81.556)
NetJ1_19: J1.19 U1.P19 | length 100
  Top Layer w0.15: U1.P19@57.57,82.406 v1(58.07,82.906)
  Layer 3 w0.15: v1(58.07,82.906) 58.07,83.411 64.439,89.78 97.982,89.78 98.876,90.675 118.914,90.675 120.148,89.441 120.148,61.122 118.895,59.868 117.678,59.868 J1.19@116.332,61.214
NetJ1_20: J1.20 U1.U9 | length 90
  Top Layer w0.15: v1(60.07,71.906) U1.U9@60.57,72.406 ; v1(109.017,62.477) 117.609,62.477 J1.20@118.872,61.214
  Layer 3 w0.15: v1(60.07,71.906) 60.07,71.401 59.672,71.003 59.672,64.316 59.909,64.08 60.685,64.08 61.32,63.445 61.32,58.151 61.966,57.505 68.447,57.505 72.191,53.761 74.239,53.761 75.501,52.499 75.501,50.587 76.496,49.592 98.053,49.592 99.751,51.289 108.346,51.289 109.017,51.96 v1(109.017,62.477)
NetJ1_21: J1.21 U1.A17 | length 153.8
  Top Layer w0.15: U1.A17@44.57,80.406 40.985,80.406 38.708,82.683 38.708,106.406 42.663,110.36 101.053,110.36 107.586,103.828 114.59,103.828 115.135,103.283 v1(115.557,103.283)
  Layer 2 w0.15: v1(115.557,103.283) 116.723,103.283 117.627,102.38 117.627,87.37 117.922,87.075 117.922,65.344 J1.21@116.332,63.754
NetJ1_22: J1.22 U1.F15 | length 163.7
  Top Layer w0.15: v1(42.988,79.909) 41.129,79.909 38.458,82.579 38.458,106.203 38.458,106.51 42.559,110.61 42.866,110.61 101.157,110.61 107.689,104.078 115.772,104.078 116.036,103.814 v1(116.073,103.814) ; v1(49.035,77.906) 49.052,77.906 49.552,78.406 U1.F15@49.57,78.406 ; J1.22@118.872,63.754 120.56,65.442 v1(120.56,86.066)
  Layer 2 w0.15: v1(42.988,79.909) 46.562,79.909 48.565,77.906 v1(49.035,77.906) ; v1(116.073,103.814) 117.388,103.814 117.877,103.325 117.877,100.925 118.097,100.705 119.647,100.705 119.822,100.53 119.822,86.723 120.184,86.362 120.264,86.362 v1(120.56,86.066)
NetJ1_23: J1.23 U1.B17 | length 150.9
  Top Layer w0.15: U1.B17@45.57,80.406 45.037,80.939 40.805,80.939 38.958,82.787 38.958,106.266 42.803,110.11 100.95,110.11 107.482,103.578 114.373,103.578 v1(115.147,102.804)
  Layer 2 w0.15: v1(115.147,102.804) 116.726,102.804 117.377,102.153 117.377,87.266 117.672,86.971 117.672,67.634 J1.23@116.332,66.294
NetJ1_24: J1.24 U1.E15 | length 161.7
  Top Layer w0.15: v1(42.968,78.993) 41.048,78.993 37.958,82.083 37.958,106.717 42.352,111.11 101.364,111.11 107.896,104.578 117.597,104.578 v1(118.361,103.814) ; v1(48.07,77.906) U1.E15@48.57,78.406 ; J1.24@118.872,66.294 118.872,67.49 120.186,68.805 120.186,86.268 120.498,86.579 v1(120.498,87.162)
  Layer 2 w0.15: v1(42.968,78.993) 43.007,78.993 43.27,79.256 46.72,79.256 v1(48.07,77.906) ; v1(118.361,103.814) 120.498,101.677 v1(120.498,87.162)
NetJ1_27: J1.27 U1.P16 | length 83.8
  Top Layer w0.15: U1.P16@57.57,79.406 58.07,78.906 v1(58.07,77.906)
  Layer 3 w0.15: v1(58.07,77.906) 58.07,78.465 59.474,79.869 59.474,83.01 65.744,89.28 98.189,89.28 99.058,90.149 108.337,90.149 110.194,88.292 110.194,73.281 110.887,72.587 115.119,72.587 J1.27@116.332,71.374
NetJ1_28: J1.28 U1.L6 | length 102.6
  Top Layer w0.15: v1(54.07,69.906) U1.L6@54.57,69.406
  Layer 2 w0.15: v1(53.541,63.345) 53.541,69.377 v1(54.07,69.906)
  Layer 3 w0.15: v1(60.571,63.345) 60.571,58.148 61.713,57.005 68.239,57.005 72.04,53.204 73.395,53.204 74.236,52.364 74.236,51.145 76.289,49.092 108.886,49.092 109.508,49.714 114.169,49.714 115.119,50.664 115.119,69.264 116.023,70.168 117.666,70.168 J1.28@118.872,71.374
  Bottom Layer w0.15: v1(53.541,63.345) v1(60.571,63.345)
NetJ1_30: J1.30 U1.L8 | length 109.7
  Top Layer w0.15: v1(54.112,70.899) 54.112,70.923 54.57,71.382 U1.L8@54.57,71.406
  Layer 2 w0.15: v1(52.747,62.779) 52.72,62.807 52.72,65.051 52.77,65.101 52.77,67.586 52.72,67.636 52.72,70.051 53.568,70.899 v1(54.112,70.899)
  Layer 3 w0.15: v1(60.07,62.762) 60.07,58.295 61.61,56.755 68.136,56.755 71.937,52.954 72.729,52.954 73.198,52.485 73.198,51.794 76.15,48.842 108.99,48.842 109.612,49.464 114.273,49.464 115.382,50.573 115.382,66.995 116.057,67.669 119.647,67.669 119.856,67.878 119.856,72.93 J1.30@118.872,73.914
  Bottom Layer w0.15: v1(52.747,62.779) 56.305,62.779 56.396,62.87 59.908,62.87 60.016,62.762 v1(60.07,62.762)
NetJ1_32: J1.32 U1.D13 | length 193.6
  Top Layer w0.15: v1(42.988,77.257) 37.511,77.257 37.261,77.507 31.436,77.507 28.681,74.752 28.681,44.519 45.426,27.775 112.066,27.775 119.92,35.628 119.92,54.467 119.647,54.74 v1(119.647,54.76) ; v1(47.07,76.906) U1.D13@47.57,76.406
  Layer 2 w0.15: v1(42.988,77.257) 44.2,77.257 44.29,77.167 45.433,77.167 45.522,77.256 46.72,77.256 v1(47.07,76.906) ; J1.32@118.872,76.454 119.822,75.504 119.822,54.989 119.647,54.814 v1(119.647,54.76)
NetJ1_33: J1.33 U1.P17 | length 73.8
  Top Layer w0.15: U1.P17@57.57,80.406 v1(58.07,80.906)
  Layer 3 w0.15: v1(58.07,80.906) 58.494,81.331 58.494,82.437 65.588,89.53 98.085,89.53 98.98,90.425 114.257,90.425 115.069,89.612 115.069,80.257 J1.33@116.332,78.994
NetJ1_34: J1.34 U1.E13 | length 193.2
  Top Layer w0.15: U1.E13@48.57,76.406 48.57,76.379 48.059,75.868 44.285,75.868 43.766,75.35 37.133,75.35 36.936,75.152 30.142,75.152 29.431,74.442 29.431,44.83 45.736,28.525 111.74,28.525 118.097,34.882 v1(118.097,36.086)
  Layer 2 w0.15: v1(118.097,36.086) 119.001,36.991 119.206,36.991 120.072,37.857 120.072,76.598 118.872,77.798 J1.34@118.872,78.994
NetJ1_35: J1.35 U1.P18 | length 73.3
  Top Layer w0.15: U1.P18@57.57,81.406 v1(58.07,81.906) ; v1(61.411,86.257) 62.937,86.257 65.294,88.614 96.863,88.614 98.948,90.699 116.4,90.699 117.375,89.724 117.375,82.577 J1.35@116.332,81.534
  Layer 2 w0.15: v1(58.07,81.906) 61.411,85.247 v1(61.411,86.257)
NetJ1_36: J1.36 U1.F13 | length 202.3
  Top Layer w0.15: v1(43.246,77.763) 43.241,77.757 31.333,77.757 28.431,74.856 28.431,44.393 45.322,27.502 112.148,27.502 120.422,35.777 v1(120.422,55.845) ; v1(49.073,76.903) U1.F13@49.57,76.406
  Layer 2 w0.15: v1(43.246,77.763) 44.131,77.763 44.477,77.417 45.307,77.417 45.396,77.506 46.965,77.506 47.568,76.903 v1(49.073,76.903) ; J1.36@118.872,81.534 120.422,79.984 v1(120.422,55.845)
NetJ1_37: J1.37 U1.T18 | length 65.5
  Top Layer w0.15: U1.T18@59.57,81.406 v1(60.07,81.906) ; v1(68.71,87.114) 68.71,87.595 68.798,87.682 69.694,87.682 70.125,88.114 97.07,88.114 99.155,90.199 114.109,90.199 114.746,89.561 114.746,85.66 J1.37@116.332,84.074
  Layer 2 w0.15: v1(60.07,81.906) 60.72,82.556 61.366,82.556 63.366,84.556 66.215,84.556 67.443,85.785 67.443,85.848 v1(68.71,87.114)
NetJ1_38: J1.38 U1.G13 | length 202.2
  Top Layer w0.15: v1(42.988,75.886) 37.316,75.886 36.832,75.402 30.038,75.402 29.181,74.545 29.181,44.726 45.633,28.275 111.859,28.275 118.796,35.212 v1(118.796,36.086) ; v1(50.07,76.906) U1.G13@50.57,76.406
  Layer 2 w0.15: v1(118.796,36.086) 120.772,38.062 120.772,82.174 J1.38@118.872,84.074
  Layer 3 w0.15: v1(42.988,75.886) 48.55,75.886 49.571,76.906 v1(50.07,76.906)
NetJ1_39: J1.39 U1.R18 | length 64.2
  Top Layer w0.15: U1.R18@58.57,81.406 v1(59.07,81.906) ; v1(68.71,88.132) 69.79,88.132 70.022,88.364 96.967,88.364 99.052,90.449 114.408,90.449 115.166,89.691 115.166,87.78 J1.39@116.332,86.614
  Layer 2 w0.15: v1(59.07,81.906) 59.575,81.906 62.925,85.256 65.834,85.256 v1(68.71,88.132)
NetJ1_40: J1.40 U1.D14 | length 141.9
  Top Layer w0.15: v1(42.988,78.467) 41.22,78.467 37.708,81.979 37.708,106.82 42.249,111.36 101.468,111.36 108,104.828 118.476,104.828 120.738,102.566 120.738,88.48 J1.40@118.872,86.614 ; v1(47.118,77.858) U1.D14@47.57,77.406
  Layer 2 w0.15: v1(42.988,78.467) 45.584,78.467 46.145,77.906 46.643,77.906 46.691,77.858 v1(47.118,77.858)
NetJ1_41: J1.41 U1.G14 | length 214.4
  Top Layer w0.15: v1(43.57,76.906) 37.508,76.906 37.157,77.257 31.54,77.257 28.931,74.649 28.931,44.623 45.529,28.025 111.963,28.025 119.42,35.482 v1(119.42,36.109) ; U1.G14@50.57,77.406 50.908,77.068 50.908,76.919 v1(50.946,76.881)
  Layer 2 w0.15: J1.41@116.332,89.154 116.332,87.958 117.422,86.868 117.422,68.191 116.865,67.634 115.872,67.634 115.24,67.002 115.24,62.85 115.861,62.229 117.107,62.229 117.497,61.839 117.497,35.94 117.836,35.601 118.912,35.601 v1(119.42,36.109)
  Layer 3 w0.15: v1(43.57,76.906) 43.92,77.256 50.571,77.256 v1(50.946,76.881)
NetJ1_43: J1.43 U1.A16 | length 128.3
  Top Layer w0.15: U1.A16@44.57,79.406 40.989,79.406 38.208,82.186 38.208,106.367 38.208,106.613 42.456,110.86 42.702,110.86 101.26,110.86 107.793,104.328 116.552,104.328 117.537,103.343 117.537,92.899 J1.43@116.332,91.694
NetJ2_3: J2.3 U1.N2 | length 69.1
  Top Layer w0.15: U1.N2@56.57,65.406 v1(57.07,64.906)
  Layer 3 w0.15: v1(57.07,64.906) 57.07,57.651 59.379,55.342 68.488,55.342 77.693,46.137 106.009,46.137 J2.3@111.252,40.894
NetJ2_4: J2.4 U1.P5 | length 81.1
  Top Layer w0.15: U1.P5@57.57,68.406 v1(58.07,67.906)
  Layer 2 w0.15: v1(58.07,67.906) 57.705,67.541 56.21,67.541 55.752,67.083 55.752,63.829 62.137,57.444 62.137,54.705 63.48,53.362 85.668,53.362 87.203,51.828 101.012,51.828 101.486,52.302 101.486,53.362 101.901,53.778 102.793,53.778 103.109,53.778 103.112,53.774 104.373,53.774 109.585,48.563 109.585,43.306 110.749,42.141 112.545,42.141 J2.4@113.792,40.894
NetJ2_5: J2.5 U1.M2 | length 80.2
  Top Layer w0.15: U1.M2@55.57,65.406 55.586,65.406 56.086,64.906 v1(56.102,64.906)
  Layer 3 w0.15: v1(56.102,64.906) 56.07,64.874 56.07,56.453 57.445,55.078 68.361,55.078 79.335,44.104 106.699,44.104 110.985,39.817 114.059,39.817 114.742,40.5 114.742,41.288 113.803,42.227 112.459,42.227 J2.5@111.252,43.434
NetJ2_6: J2.6 U1.W5 | length 71.6
  Top Layer w0.15: U1.W5@62.57,68.406 62.57,68.381 63.07,67.881 v1(63.07,67.856)
  Layer 2 w0.15: v1(63.07,67.856) 63.02,67.856 62.637,67.473 62.637,54.946 63.456,54.128 104.373,54.128 110.023,48.479 110.023,45.426 110.835,44.614 112.612,44.614 J2.6@113.792,43.434